# Altium PCB Main_Board.PcbDoc (part 10 of 14)
Units mm, origin at the board's own origin, x right, y up, seen from the top; angles counter-clockwise.
Board outline 142 x 82 mm, 10 copper layers (L1_Top, L2_PWR1, L3_Sig1, L4_GND1, L5_Sig2, L6_Sig3, L7_GND2, L8_Sig4, L9_GND3, L8_Bottom), stack 1.71 mm thick; 299 components, 328 nets, 2329 pads, 2908 vias.
Unrouted connection lines stored in the file: 2.
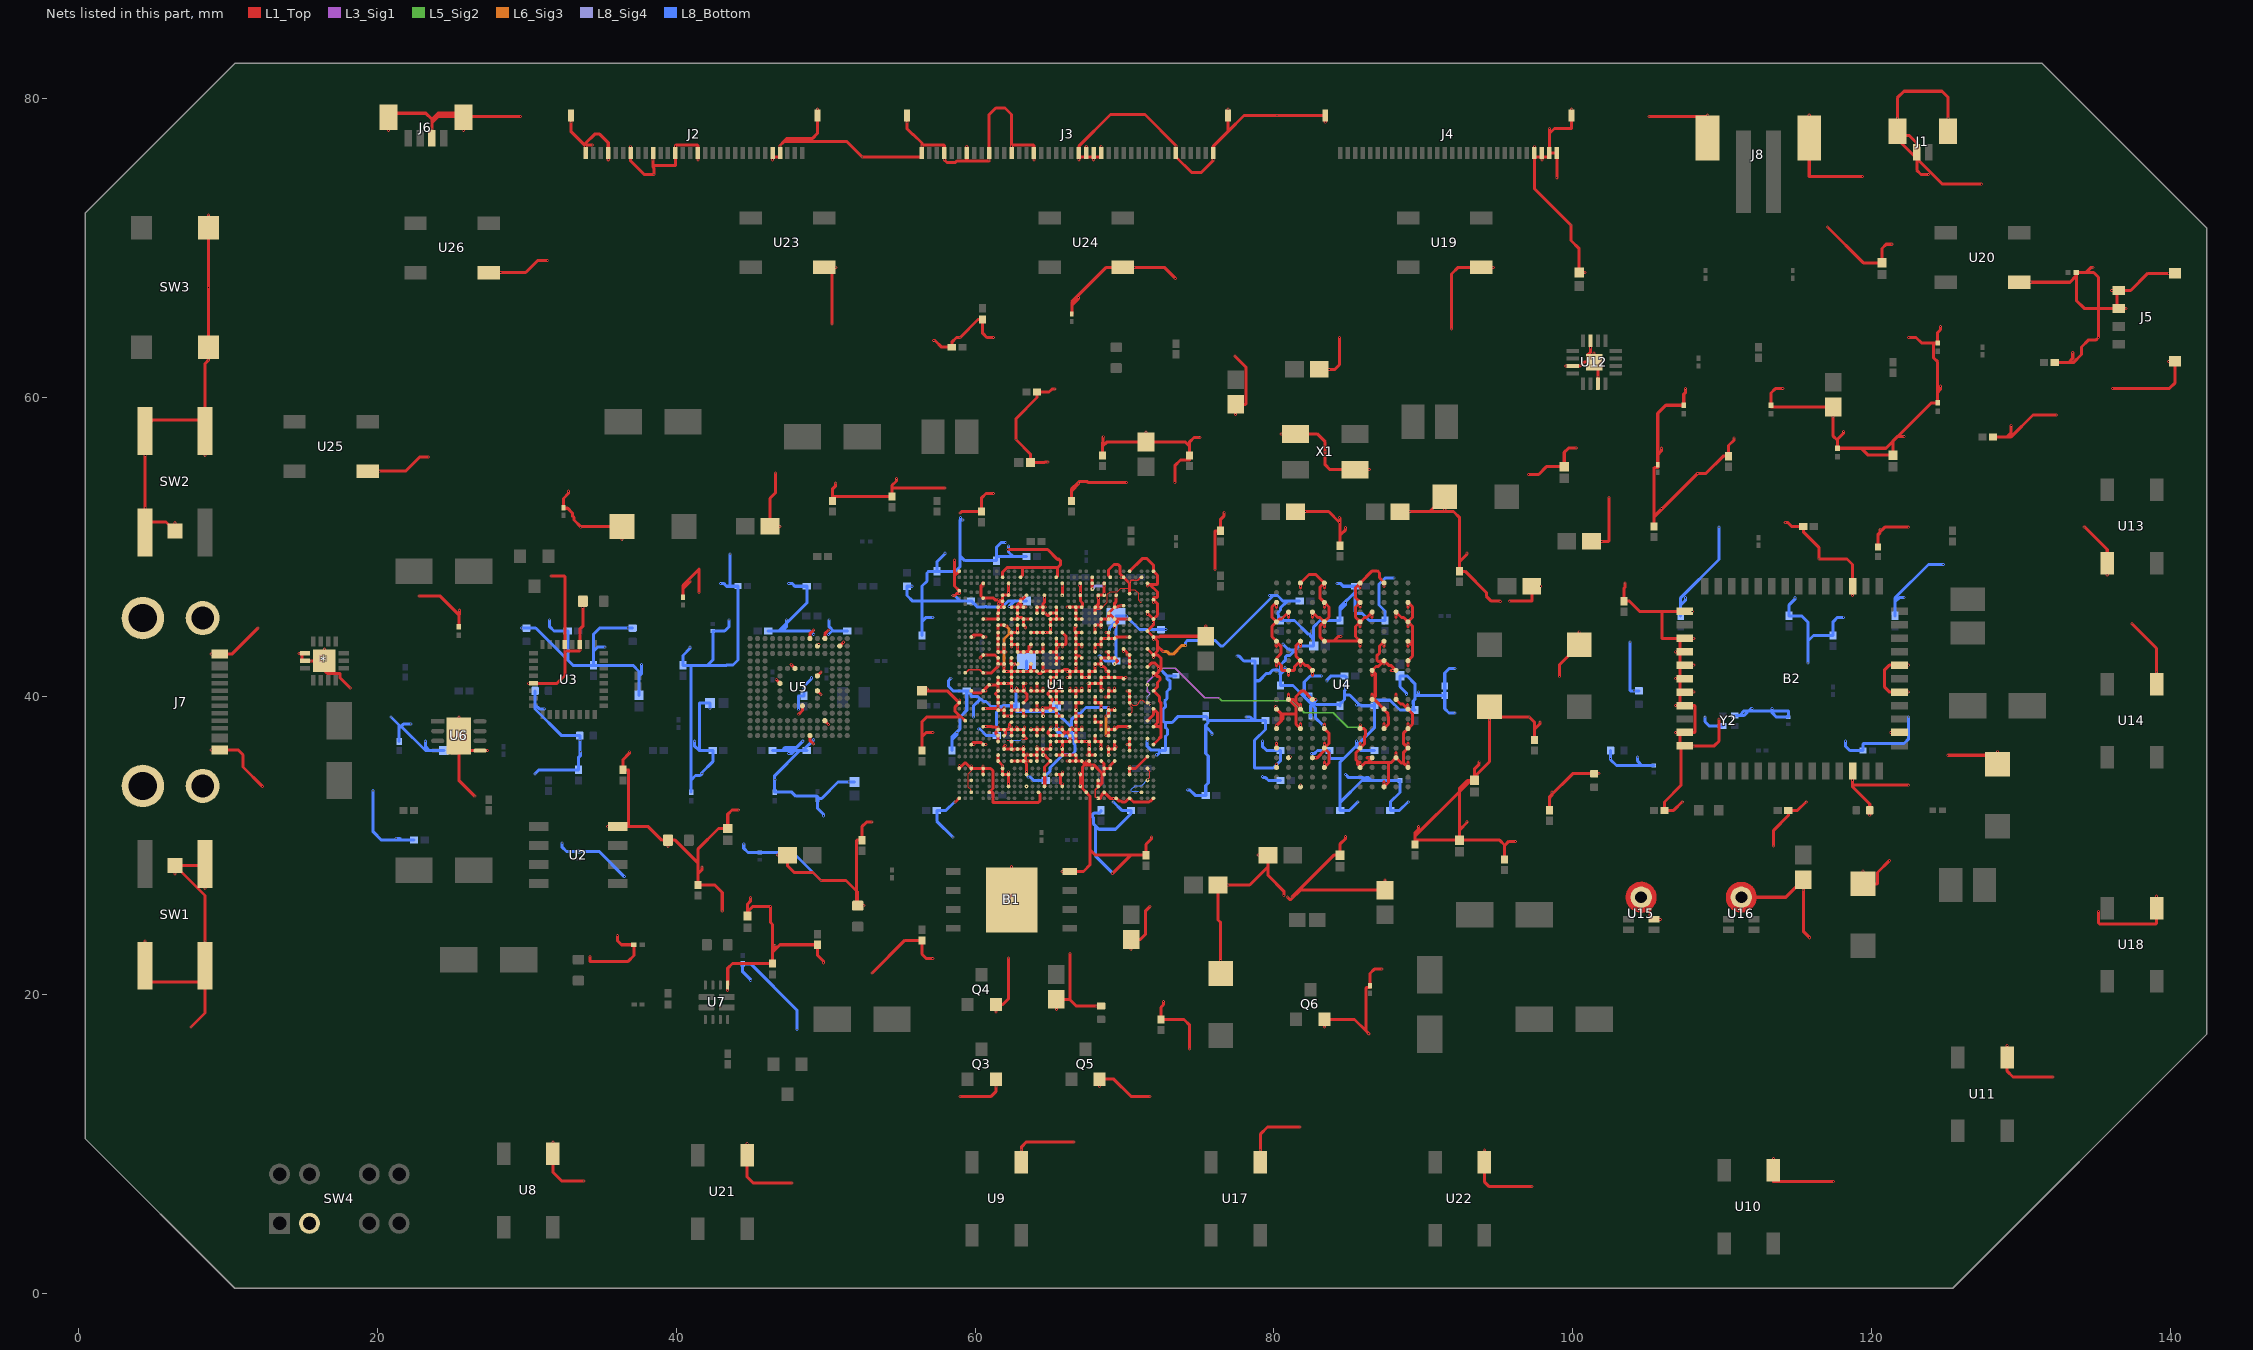
[diagram p17: the nets of this part, all layers, seen from the top]

## Via types
v1: diameter 0.1, hole 0.08, L1_Top to L8_Bottom, 1169 vias
v2: diameter 0.01, hole 0.01, L3_Sig1 to L8_Sig4, 433 vias
v3: diameter 0.01, hole 0.01, L8_Sig4 to L8_Bottom, 375 vias
v4: diameter 0.01, hole 0.01, L1_Top to L3_Sig1, 355 vias
v5: diameter 0.254, hole 0.01, L1_Top to L8_Bottom, 150 vias
v6: diameter 0.01, hole 0.01, L6_Sig3 to L8_Bottom, 129 vias
v7: diameter 0.05, hole 0.04, L1_Top to L8_Bottom, 104 vias
v8: diameter 0.01, hole 0.01, L1_Top to L5_Sig2, 89 vias
v9: diameter 0.01, hole 0.01, L1_Top to L8_Bottom, 41 vias
v10: diameter 0.1, hole 0.08, L1_Top to L3_Sig1, 17 vias
v11: diameter 0.1, hole 0.08, L1_Top to L5_Sig2, 11 vias
v12: diameter 0.1, hole 0.08, L8_Sig4 to L8_Bottom, 10 vias
v13: diameter 0.1, hole 0.08, L6_Sig3 to L8_Bottom, 9 vias
v14: diameter 1.27, hole 0.711, L1_Top to L8_Bottom, 8 vias
v15: diameter 0.4, hole 0.2, L1_Top to L8_Bottom, 4 vias
v16: diameter 0.05, hole 0.08, L1_Top to L8_Bottom, 3 vias
v17: diameter 0.05, hole 0.08, L6_Sig3 to L8_Bottom, 1 vias

## Nets (pads, with @x,y where several pads share a name; then routed paths per layer and width w, separated by ;. In a path a pad name is that pad's centre, name@x,y a point inside that pad or via, vN(x,y) a via of type N, cw(c..) or ccw(c..) an arc to the next point about the centre after c; other vN are vias at no path point) (continued)
GND: (continued)
  L1_Top w0.203: v1(4.441,23.599) SW1.B'@4.441,21.949 4.441,20.845 SW1.A'@8.441,20.845 ; v1@4.441,52.595 v1(4.441,52.599) ; v1(6.441,28.099) SW1.1@6.441,28.649 ; v1(6.441,51.599) SW2.1@6.441,51.049 5.835,51.656 4.441,51.656 SW2.A@4.441,50.949 v1(4.441,52.599) ; v7(7.514,17.848) 8.441,18.775 SW1.A'@8.441,20.845 ; v1(8.441,27.099) SW1.A@8.441,28.749 8.441,28.649 SW1.1@6.441,28.649 ; v1(8.441,56.099) SW2.B'@8.441,57.749 SW2.B'@8.441,58.463 ; v1(8.691,62.499) SW3.3@8.691,63.349 ; v1(8.691,72.199) SW3.4@8.691,71.349 8.691,67.362 v7(8.683,67.353) 8.691,67.344 SW3.3@8.691,63.349 ; v1(8.841,36.399) J7.B1@9.441,36.399 10.655,36.399 10.994,36.06 10.994,35.247 v7(12.289,33.952) ; v1(8.841,42.799) J7.A1@9.441,42.799 10.24,42.799 v7(11.985,44.544) ; v1(14.741,42.849) *.8@14.931,42.849 ; *.8@15.141,42.849 *.8@14.931,42.849 ; v1(16.441,43.149) *.15@16.441,42.349 *.15@15.805,42.349 ; v7(18.171,40.542) 17.471,41.242 17.471,41.496 17.446,41.521 16.633,41.521 *.15@15.805,42.349 ; U25.3@19.341,55.049 v1(20.141,55.049) 21.865,55.049 22.815,55.999 v7(23.415,55.999) ; v1(20.741,77.849) J6.S1@20.741,78.749 20.741,79.011 23.235,79.011 23.641,78.605 ; v7(22.78,46.703) 24.171,46.703 25.441,45.433 25.441,45.415 ; J6.3@23.641,77.349 v1(23.641,77.949) 23.641,78.375 ; C140.2@25.441,44.629 25.441,45.415 ; v1(25.443,38.599) U6.9@25.443,37.324 U6.9@25.443,36.349 ; v1(25.472,45.742) 25.472,45.446 25.441,45.415 ; v1(25.741,77.849) J6.S2@25.741,78.749 J6.S2@25.741,78.808 ; v7(26.513,33.291) 25.443,34.362 U6.9@25.443,36.349 ; v1(27.349,36.349) U6.5@26.858,36.349 U6.9@25.443,36.349 ; U26.3@27.441,68.349 v1(28.241,68.349) 29.917,68.349 30.724,69.156 v7(31.39,69.156) ; v7(29.561,78.808) J6.S2@25.741,78.808 ; v1(30.109,40.849) U3.5@30.441,40.849 32.012,40.849 32.541,41.378 32.541,43.045 ; v7(31.619,48.023) 32.508,48.023 32.541,47.99 U3.29@32.541,43.449 v1(32.541,43.099) 32.541,43.045 ; v1(31.741,10.149) U8.3@31.741,9.349 31.741,8.12 32.326,7.536 v7(33.803,7.536) ; v1(32.787,53.713) 32.787,53.575 32.441,53.229 R32.2@32.441,52.604 32.441,52.57 32.724,52.57 33.041,52.252 33.041,52.062 33.143,51.96 33.143,51.783 33.6,51.325 v7(33.6,51.3) 33.649,51.349 D17.1@36.366,51.349 v1(36.366,50.474) ; J2.31@32.941,78.849 v1(32.941,78.399) 32.941,77.802 v1@33.941,76.802 ; C145.2@33.741,46.349 v1(33.741,45.919) 33.741,44.671 33.541,44.471 U3.27@33.541,43.449 v1(33.541,43.099) 33.541,43.045 33.516,43.02 32.567,43.02 32.541,43.045 ; J2.1@33.941,76.349 v1(33.941,76.799) v1@33.941,76.802 ; v7(34.21,22.56) 34.21,22.268 34.235,22.242 36.775,22.242 37.161,22.629 C139.2@37.161,23.349 36.335,23.349 36.049,23.636 v1(36.049,23.97) ; v7(34.387,76.878) 33.967,76.878 33.941,76.852 ; v1(35.391,31.254) U2.4@36.091,31.254 36.775,31.254 ; v1(35.441,75.899) J2.4@35.441,76.349 35.441,77.043 34.87,77.614 34.538,77.614 33.941,77.017 33.941,76.852 ; v1(36.851,36.268) 36.851,36.161 36.441,35.751 R49.2@36.441,35.058 36.775,35.058 36.8,35.032 36.8,31.28 36.775,31.254 ; v1(36.941,76.799) J2.7@36.941,76.349 36.941,75.811 37.83,74.922 v7(38.502,74.922) 38.502,75.344 38.441,75.405 38.441,75.532 ; J2.10@38.441,76.349 v1(38.441,75.899) 38.441,75.532 ; v1(39.441,29.919) C146.2@39.441,30.349 ; R34.2@40.441,46.603 40.441,47.165 ; v1(40.915,47.713) 40.915,47.638 40.441,47.165 ; v1(41.441,75.899) J2.16@41.441,76.349 41.441,76.852 41.416,76.878 39.967,76.878 39.941,76.852 v1(39.941,76.799) J2.13@39.941,76.349 39.941,75.532 39.916,75.506 38.467,75.506 38.441,75.532 ; v7(41.525,46.938) 41.525,48.497 40.441,47.414 40.441,47.165 ; v1(41.728,28.559) 41.728,28.391 41.441,28.104 ; v7(43.074,25.595) 43.074,26.852 42.577,27.349 C30.2@41.441,27.349 41.441,28.104 ; U7.9@43.441,20.649 43.441,21.781 43.76,22.099 R71.1@46.441,22.099 ; v1(44.166,32.374) 43.728,32.374 43.441,32.087 C57.2@43.441,31.127 42.829,31.127 41.441,29.74 41.441,28.832 ; v1(44.741,10.049) U21.3@44.741,9.249 44.741,7.802 45.135,7.409 v7(47.748,7.409) ; v1(44.979,26.497) 44.979,26.287 44.776,26.083 C147.2@44.776,25.274 44.776,25.582 45.093,25.9 v7(46.3,25.9) 46.3,24.848 46.441,24.706 46.441,22.914 ; v1(46.441,75.899) J2.26@46.441,76.09 ; J2.26@46.441,76.349 J2.26@46.441,76.09 ; v1(46.605,23.307) 46.605,23.077 46.441,22.914 ; v7(46.63,54.932) 46.63,53.594 46.267,53.23 C89.2@46.267,51.349 v1(46.944,51.349) ; v1(46.691,41.099) U5.H10@46.941,40.849 ; v1(46.764,29.349) C90.2@47.441,29.349 47.441,28.632 47.887,28.186 49.145,28.186 v7(49.678,27.653) 51.355,27.653 52.066,26.941 ; v1(47.691,42.099) U5.K8@47.941,41.849 ; v1(48.191,38.782) 48.441,39.032 U5.E7@48.441,39.349 ; U5.A6@48.941,37.349 48.941,37.032 v1(49.191,36.782) ; U5.P6@48.941,43.849 48.941,44.167 v1(49.191,44.417) ; U5.G5@49.441,40.349 v1(49.691,40.099) ; U5.J5@49.441,41.349 v1(49.691,41.599) ; U5.N5@49.441,43.349 v1(49.535,43.442) ; v1(49.441,79.299) J2.32@49.441,78.849 49.441,77.652 49.124,77.335 47.424,77.335 47.195,77.106 ; v1(49.856,22.139) 49.856,22.244 49.441,22.658 R50.1@49.441,23.349 46.935,23.349 46.441,22.856 ; U5.C4@49.941,38.349 v1(50.191,38.099) ; U5.P4@49.941,43.849 49.941,44.167 v1(50.191,44.417) ; v7(50.415,64.914) 50.415,68.699 U23.3@49.891,68.699 v1(50.691,68.699) ; v1(50.669,54.268) 50.669,54.07 50.441,53.842 C58.2@50.441,53.058 50.441,53.349 C60.2@54.441,53.349 ; U5.N2@50.941,43.349 v1(51.191,43.599) ; v1(52.572,25.965) C148.2@52.142,25.965 ; v7(53.107,21.455) 55.293,23.641 C50.2@56.441,23.641 56.441,22.717 56.728,22.431 v1(57.171,22.431) ; v1(53.107,31.559) 52.728,31.559 52.441,31.272 C48.2@52.441,30.349 52.091,30.349 52.066,30.324 52.066,26.941 ; v1(54.733,54.559) 54.733,54.393 54.441,54.102 C60.2@54.441,53.349 ; J3.41@55.441,78.849 v1(55.441,78.399) 55.441,77.97 55.822,77.589 55.87,77.589 56.441,77.017 56.441,76.852 ; C52.2@56.441,36.349 56.441,37.272 ; C43.2@56.441,40.349 56.82,40.349 ; v1(56.82,40.463) 56.82,40.349 ; v1(57.171,37.559) 56.728,37.559 56.441,37.272 ; v1(57.231,63.797) 57.32,63.797 57.767,63.349 C133.2@58.441,63.349 58.441,63.682 58.759,64 v7(59,64) 60.202,65.202 R25.1@60.503,65.202 60.503,64.28 60.79,63.994 v1(61.235,63.994) ; v7(57.984,53.934) 54.479,53.934 54.441,53.897 C60.2@54.441,53.349 ; v1(58.523,46.728) 58.659,46.728 58.805,46.874 v1(58.941,46.874) U1.D33@58.941,47.049 58.621,47.369 58.621,48.029 ; v7(58.632,49.09) 58.621,49.09 58.621,48.029 ; v1(58.651,32.91) 58.69,32.91 58.929,33.149 U1.AU33@58.941,33.149 ; v1(58.941,35.345) U1.AM33@58.941,35.149 59.293,35.501 59.389,35.501 U1.AM31@59.741,35.149 ; v1(58.941,39.724) U1.AB33@58.941,39.549 ; U1.A33@58.941,48.349 58.621,48.029 ; v7(59,13.2) 61.074,13.2 61.391,13.517 v1(61.391,13.849) Q3.2@61.391,14.349 ; v7(59,52.252) 59.097,52.349 C62.2@60.441,52.349 60.441,53.272 60.728,53.559 v1(61.235,53.559) ; U1.AE32@59.341,38.349 59.091,38.6 59.039,38.6 ; v1(59.441,76.799) J3.7@59.441,76.349 59.441,75.836 ; v1(59.742,35.325) U1.AM31@59.742,35.15 ; U1.Y31@59.741,40.349 59.89,40.2 60.392,40.2 U1.Y29@60.541,40.349 ; v1(59.916,36.749) U1.AJ31@59.741,36.749 59.89,36.898 60.392,36.898 U1.AJ29@60.541,36.749 v1(60.716,36.749) ; v1(59.916,43.949) U1.L31@59.741,43.949 59.879,44.086 60.404,44.086 U1.L29@60.541,43.949 v1(60.716,43.949) ; v7(60.346,42.537) 60.346,42.554 U1.P29@60.541,42.749 v1(60.716,42.749) 61.329,42.749 61.529,42.549 U1.R26@61.541,42.549 U1.T26@61.541,42.149 ; U1.AN29@60.541,34.749 U1.AM29@60.541,35.149 ; v1(60.541,35.324) U1.AM29@60.541,35.149 ; U1.AF29@60.541,37.949 v1(60.716,37.949) 61.134,37.949 61.169,37.914 61.376,37.914 U1.AF26@61.541,37.749 ; U1.AC29@60.541,39.149 v1(60.716,39.149) 61.441,39.149 U1.AC26@61.541,39.049 ; U1.U29@60.541,41.549 v1(60.716,41.549) 61.093,41.549 61.439,41.896 61.463,41.896 61.541,41.974 v1(61.541,42.001) U1.T26@61.541,42.149 ; U1.H29@60.541,45.149 v1(60.716,45.149) U1.J26@61.541,45.149 U1.H26@61.541,45.549 61.565,45.573 61.565,45.925 U1.G26@61.541,45.949 61.676,45.949 61.692,45.966 U1.G25@61.925,45.966 ; v1(60.543,47.374) 60.543,47.547 U1.C29@60.541,47.549 60.397,47.405 60.397,46.694 U1.E29@60.541,46.549 61.232,46.549 61.343,46.439 v1(61.581,46.439) ; v1(60.716,40.349) U1.Y29@60.541,40.349 ; v1(61.391,18.849) Q4.2@61.391,19.349 61.857,19.349 62.226,19.717 v7(62.226,22.471) ; U1.AK26@61.541,36.049 61.54,36.048 61.54,35.651 U1.AL26@61.541,35.649 61.841,35.349 v1(61.841,35.324) U1.AM26@61.841,35.149 U1.AN26@61.841,34.749 U1.AN25@62.241,34.749 ; U1.AH26@61.541,36.949 61.54,36.951 61.54,37.348 U1.AG26@61.541,37.349 61.388,37.503 61.388,37.595 U1.AF26@61.541,37.749 ; v1(61.541,37.924) U1.AF26@61.541,37.749 ; U1.V26@61.541,41.249 U1.W26@61.541,40.849 ; U1.L26@61.541,44.249 61.54,44.248 61.54,43.851 U1.M26@61.541,43.849 U1.N26@61.541,43.449 v1(61.541,43.274) U1.P26@61.541,42.949 U1.P25@61.941,42.949 ; v1(61.541,44.408) U1.K26@61.541,44.749 U1.K25@61.941,44.749 61.941,44.737 61.992,44.686 62.055,44.686 v1(62.066,44.697) ; v1(61.581,46.174) 61.581,46.212 U1.F26@61.718,46.349 ; v1@61.581,46.398 61.692,46.398 61.718,46.372 U1.F26@61.718,46.349 ; U1.B26@61.841,47.949 61.85,47.958 61.85,48.307 62.151,48.608 63.14,48.608 ; U1.AG25@61.941,37.349 62.048,37.456 62.048,37.643 U1.AF25@61.941,37.749 ; v1(61.941,39.224) U1.AC25@61.941,39.049 ; U1.N25@61.941,43.449 v1(61.941,43.274) U1.P25@61.941,42.949 ; U1.G25@61.941,45.949 U1.G25@61.925,45.966 ; v1(62.019,36.702) 61.95,36.633 61.95,36.458 U1.AJ25@61.941,36.449 U1.AJ24@62.441,36.449 ; v1(62.073,42.949) U1.P25@61.941,42.949 ; v7(62.189,49.801) 64.857,49.801 65.503,49.155 65.602,49.155 65.733,49.025 65.733,48.81 65.53,48.608 ; U1.AR25@62.241,33.949 v1(62.241,34.124) U1.AN25@62.241,34.749 ; v1(62.241,34.924) U1.AN25@62.241,34.749 ; U1.C25@62.241,47.549 v1(62.241,47.374) v1(62.241,46.924) U1.E25@62.241,46.749 U1.E26@61.841,46.749 U1.F26@61.841,46.349 ; v1@62.28,37.911 U1.AF24@62.441,37.749 ; v1(62.294,37.924) 62.294,38.089 62.441,38.237 U1.AE24@62.441,38.249 ; v1(62.404,36.587) v1@62.441,36.587 ; B1.9@62.441,26.349 v1(62.441,28.574) ; U1.AL24@62.441,35.649 U1.AL23@62.841,35.649 U1.AL22@63.241,35.649 ; U1.AH24@62.441,36.949 62.441,36.624 v1@62.441,36.587 ; U1.AG24@62.441,37.349 U1.AF24@62.441,37.749 ; v1(62.441,37.924) U1.AF24@62.441,37.749 ; U1.AB24@62.441,39.549 62.429,39.537 62.429,39.062 U1.AC24@62.441,39.049 ; U1.R24@62.441,42.549 62.441,42.537 62.393,42.488 62.393,42.21 62.441,42.162 U1.T24@62.441,42.149 ; v1(62.441,43.274) U1.N24@62.441,43.449 ; U1.J24@62.441,45.149 U1.J23@62.841,45.149 62.841,45.16 62.94,45.259 63.045,45.259 63.062,45.243 63.135,45.243 63.229,45.149 U1.J22@63.241,45.149 ; U1.G24@62.441,45.949 U1.G23@62.841,45.949 ; J3.13@62.441,76.349 v1(62.441,76.799) 62.441,76.852 ; U1.T24@62.566,42.149 U1.T23@62.841,42.149 ; v1(62.579,42.069) 62.534,42.069 62.51,42.093 62.454,42.149 U1.T24@62.441,42.149 ; v1(62.604,36.387) 62.516,36.387 62.454,36.449 U1.AJ24@62.441,36.449 ; 62.604,36.449 U1.AJ23@62.841,36.449 U1.AJ22@63.241,36.449 ; v1(62.781,37.924) 62.832,37.873 62.832,37.758 U1.AF23@62.841,37.749 ; v1(62.781,40.524) 62.832,40.473 62.832,40.358 U1.Y23@62.841,40.349 ; v1(62.838,44.37) U1.L23@62.841,44.37 ; U1.K23@62.841,44.749 62.841,44.574 U1.L23@62.841,44.37 ; U1.J23@62.841,45.259 U1.H23@62.841,45.549 U1.G23@62.841,45.949 ; 62.958,46.218 62.85,46.11 62.85,45.958 U1.G23@62.841,45.949 ; U1.B23@63.041,47.949 63.166,48.073 63.166,48.582 63.14,48.608 ; U9.3@63.091,8.799 v1(63.091,9.599) 63.091,9.798 63.445,10.152 v7(66.62,10.152) ; v1(63.156,46.174) 63.041,46.174 63.041,46.218 63.041,46.266 U1.F23@63.041,46.349 63.041,46.487 63.179,46.487 U1.E22@63.441,46.749 ; v1(63.241,36.624) U1.AJ22@63.241,36.449 ; U1.AB22@63.241,39.549 63.488,39.796 63.488,40.103 U1.Y22@63.241,40.349 ; 63.241,40.53 U1.W22@63.241,40.849 v1(63.416,40.849) ; v1(63.302,37.924) 63.302,37.822 63.241,37.762 U1.AF22@63.241,37.749 ; v1(63.307,40.53) 63.307,40.428 63.241,40.362 U1.Y22@63.241,40.349 ; v1(63.359,44.547) 63.359,44.619 63.241,44.737 U1.J22@63.241,45.149 ; v1(63.416,38.649) U1.AD22@63.241,38.649 U1.AC22@63.241,39.049 63.115,39.049 63.107,39.057 62.841,39.057 U1.AC23@62.841,39.049 U1.AC24@62.441,39.049 ; v1(63.416,45.949) U1.G22@63.241,45.949 U1.G23@62.841,45.949 ; v1(63.439,34.955) v1@63.441,34.955 ; U1.AN22@63.441,34.749 63.441,34.924 v1@63.441,34.955 ; 63.445,37.158 63.254,37.349 U1.AG22@63.241,37.349 U1.AF22@63.241,37.749 ; 63.477,36.049 U1.AK21@63.741,36.049 U1.AK20@64.141,36.049 ; v1(63.477,36.11) 63.477,36.077 63.458,36.058 63.25,36.058 U1.AK22@63.241,36.049 ; U1.AL21@63.741,35.649 v1(63.502,35.649) 63.416,35.649 U1.AL22@63.241,35.649 ; v1(63.741,37.824) U1.AF21@63.741,37.749 U1.AF20@64.141,37.749 ; U1.AC21@63.741,39.049 U1.AC20@64.141,39.049 ; v1(63.741,40.524) U1.Y21@63.741,40.349 U1.Y20@64.141,40.349 ; U1.T21@63.741,42.149 63.724,42.132 63.724,41.666 U1.U21@63.741,41.649 ; v1(63.741,43.274) U1.N21@63.741,43.449 63.597,43.305 63.597,43.093 U1.P21@63.722,42.969 ; U1.L21@63.741,44.249 63.756,44.264 64.126,44.264 U1.L20@64.141,44.249 U1.L19@64.541,44.249 v1(64.716,44.249) U1.L18@65.041,44.249 v1(65.041,44.574) U1.K18@65.041,44.749 U1.J18@65.041,45.149 U1.J17@65.441,45.149 ; U1.J21@63.741,45.149 v1(63.416,45.149) U1.J22@63.241,45.149 ; v1(63.941,75.899) J3.16@63.941,76.349 63.941,76.852 63.916,76.878 62.467,76.878 62.441,76.852 ; U1.AL20@64.141,35.649 U1.AK20@64.141,36.049 ; v1(64.141,36.624) U1.AJ20@64.141,36.449 ; U1.AG20@64.141,37.349 U1.AF20@64.141,37.749 ; v1(64.141,37.924) U1.AF20@64.141,37.749 ; U1.AB20@64.141,39.549 v1(64.141,39.224) U1.AC20@64.141,39.049 ; U1.W20@64.141,40.849 v1(64.141,40.524) U1.Y20@64.141,40.349 ; U1.H20@64.141,45.549 U1.G20@64.141,45.949 U1.G19@64.541,45.949 ; U1.AT20@64.241,33.549 64.359,33.431 64.359,32.996 64.248,32.885 61.217,32.885 61.191,32.91 61.191,33.52 61.162,33.549 U1.AT28@60.941,33.549 61.195,33.803 61.195,34.993 61.039,35.149 U1.AM29@60.541,35.149 ; v1(64.518,39.224) 64.532,39.209 64.532,39.058 U1.AC19@64.541,39.049 ; v1(64.54,41.726) U1.U19@64.541,41.726 ; v1(64.541,37.924) U1.AF19@64.541,37.749 U1.AF20@64.141,37.749 ; v1(64.541,40.524) U1.Y19@64.541,40.349 U1.Y20@64.141,40.349 ; U1.T19@64.541,42.149 U1.U19@64.541,41.726 ; U1.N19@64.541,43.449 v1(64.541,43.274) U1.P19@64.541,42.949 U1.P20@64.141,42.949 U1.P21@63.741,42.949 U1.P21@63.722,42.969 ; v1(64.574,36.448) v1(64.574,36.448) ; v1(64.574,38.649) U1.AD19@64.541,38.649 U1.AC19@64.541,39.049 ; v1(64.58,39.194) 65.031,39.194 65.041,39.183 ; v1(64.633,34.911) 64.633,34.758 U1.AN19@64.641,34.749 64.641,34.584 64.664,34.561 64.664,33.972 U1.AR19@64.641,33.949 ; v1@64.641,34.913 64.641,34.924 64.641,35.249 U1.AL18@65.041,35.649 64.715,35.976 64.715,36.024 64.69,36.049 v1(64.574,36.049) U1.AK19@64.541,36.049 U1.AJ19@64.541,36.449 ; U1.E19@64.641,46.749 v1(64.641,46.574) 64.641,46.271 64.541,46.171 U1.G19@64.541,45.949 ; 64.716,41.649 64.554,41.649 U1.U19@64.541,41.649 ; 64.716,41.679 64.999,41.679 65.029,41.649 U1.U18@65.041,41.649 U1.U17@65.441,41.649 ; v1(64.716,45.949) U1.G19@64.541,45.949 ; v1(64.867,55.669) 64.668,55.669 64.617,55.618 C91.2@63.707,55.618 63.707,56.194 v7(62.734,57.167) 62.734,58.571 64.15,59.987 C53.2@64.15,60.349 64.95,60.349 65.146,60.546 v1(65.356,60.546) ; v1(64.948,40.535) 64.948,40.743 65.041,40.837 U1.W18@65.041,40.849 U1.V18@65.041,41.249 U1.V17@65.441,41.249 U1.U17@65.441,41.649 ; 65.041,36.624 U1.AH18@65.041,36.949 ; 65.041,40.525 U1.Y18@65.041,40.349 ; U1.P18@65.041,42.949 U1.P17@65.441,42.949 ; v1(65.095,36.624) 65.095,36.515 65.041,36.462 U1.AJ18@65.041,36.449 64.716,36.449 v1(64.574,36.448) ; v1(65.095,37.924) 65.05,37.88 65.05,37.758 64.893,37.601 64.893,37.498 U1.AG18@65.041,37.349 U1.AG17@65.441,37.349 U1.AG16@65.841,37.349 66.01,37.518 66.01,37.58 U1.AF16@65.841,37.749 ; v1(65.441,19.021) C114.2@65.441,19.698 66.315,19.698 ; U1.AN17@65.441,34.749 U1.AN16@65.841,34.749 ; U1.AK17@65.441,36.049 65.448,36.043 65.835,36.043 U1.AK16@65.841,36.049 ; U1.AH17@65.441,36.949 U1.AH16@65.841,36.949 ; U1.AE17@65.441,38.249 v1(65.441,37.924) U1.AF17@65.441,37.749 U1.AF16@65.841,37.749 ; U1.T17@65.441,42.149 U1.R17@65.441,42.549 ; U1.M17@65.441,43.849 U1.N17@65.441,43.449 ; U1.G17@65.441,45.949 U1.H17@65.441,45.549 ; U1.B17@65.441,47.949 65.53,48.038 65.53,48.608 ; v1(65.561,43.274) 65.441,43.274 ; v1(65.59,40.524) 65.587,40.524 65.487,40.424 65.487,40.407 65.441,40.362 U1.Y17@65.441,40.349 ; v1(65.792,36.575) v1@65.841,36.575 ; 65.797,34.096 65.706,34.188 65.706,34.613 U1.AN16@65.841,34.749 ; v1(65.816,28.254) B1.4@66.341,28.254 67.255,28.254 67.697,28.697 67.697,29.71 ; v1(65.82,37.924) 65.832,37.912 65.832,37.758 U1.AF16@65.841,37.749 ; U1.AR16@65.841,33.949 v1(65.841,34.124) ; v1(65.841,34.924) U1.AN16@65.841,34.749 ; U1.AD16@65.841,38.649 U1.AD17@65.441,38.649 U1.AC17@65.441,39.049 65.429,39.049 65.302,39.176 65.181,39.176 65.054,39.049 U1.AC18@65.041,39.049 65.041,39.183 ; U1.AB16@65.841,39.549 U1.AB17@65.441,39.549 U1.AA17@65.441,39.949 U1.Y17@65.441,40.349 ; v1(65.841,40.524) U1.Y16@65.841,40.349 U1.Y17@65.441,40.349 ; U1.R16@65.841,42.549 U1.R17@65.441,42.549 ; v1(65.841,43.274) U1.N16@65.841,43.449 ; U1.L16@65.841,44.249 66.088,44.003 66.088,43.476 66.061,43.449 U1.N16@65.841,43.449 ; U1.J16@65.841,45.149 U1.J17@65.441,45.149 ; v1(65.841,46.715) U1.E16@65.841,46.749 v1(65.841,47.374) U1.C16@65.841,47.549 ; v1(66.166,35.649) U1.AL15@66.341,35.649 U1.AL14@66.741,35.649 ; v1(66.166,41.249) U1.V15@66.341,41.249 U1.U15@66.341,41.649 ; v1(66.166,41.649) U1.U15@66.341,41.649 ; v1(66.166,45.946) 66.338,45.946 U1.G15@66.341,45.949 U1.G14@66.741,45.949 ; v7(66.341,22.75) 66.341,19.724 66.315,19.698 ; v1(66.341,40.524) U1.Y15@66.341,40.349 U1.Y14@66.741,40.349 ; C47.2@66.441,53.058 66.441,53.714 ; R24.2@66.472,65.577 66.472,66.149 ; v1(66.486,37.899) 66.341,37.755 U1.AF15@66.341,37.749 ; v1(66.698,44.647) 66.698,44.306 66.741,44.262 U1.L14@66.741,44.249 ; U1.AA14@66.741,39.949 U1.Y14@66.741,40.349 ; v1(66.741,40.524) U1.Y14@66.741,40.349 ; U1.R14@66.741,42.602 U1.P14@66.741,42.949 v1(66.741,43.274) U1.N14@66.741,43.449 ; U1.K14@66.741,44.636 U1.K14@66.741,44.749 ; v1(66.788,39.1) U1.AC14@66.741,39.1 ; v1(66.925,54.268) 66.925,54.198 66.504,53.777 66.441,53.714 ; v1(66.925,66.687) 66.925,66.601 66.472,66.149 ; v1(66.941,75.899) J3.22@66.941,76.09 ; v1(66.994,34.842) 66.994,34.796 U1.AN13@67.041,34.749 67.041,34.124 v1(67.041,34.032) U1.AR13@67.041,33.949 ; v1(67.004,47.411) v1@67.041,47.411 ; U1.C13@67.041,47.549 v1@67.041,47.411 ; v1(67.141,37.924) U1.AF13@67.141,37.749 U1.AF14@66.741,37.749 ; U1.AD13@67.141,38.649 U1.AD14@66.741,38.649 ; U1.AB13@67.141,39.549 U1.AB14@66.741,39.549 U1.AC14@66.741,39.1 ; v1(67.141,40.524) U1.Y13@67.141,40.349 U1.Y14@66.741,40.349 ; U1.R13@67.141,42.549 67.141,42.551 67.017,42.676 66.881,42.676 66.774,42.569 66.754,42.549 U1.R14@66.741,42.549 U1.T14@66.741,42.149 v1(66.741,41.974) U1.U14@66.741,41.649 ; v1(67.141,43.274) U1.N13@67.141,43.449 U1.N14@66.741,43.449 ; U1.L13@67.141,44.249 U1.L14@66.741,44.249 ; U1.J13@67.141,45.149 U1.J14@66.741,45.149 U1.H14@66.741,45.549 66.747,45.555 66.747,45.944 U1.G14@66.741,45.949 ; U1.G13@67.141,45.949 U1.G13@67.125,45.966 ; v1(67.441,76.799) J3.23@67.441,76.349 J3.23@67.441,76.09 ; v1(67.466,35.649) U1.AL12@67.641,35.649 ; v1(67.49,36.049) U1.AK12@67.641,36.049 ; v1(67.566,40.849) U1.W12@67.641,40.849 ; U1.Y12@67.641,40.349 v1(67.641,40.524) U1.W12@67.641,40.849 ; U1.AM11@67.841,35.149 v1(67.841,35.324) ; U1.D11@67.841,47.149 U1.C11@67.841,47.549 U1.B11@67.841,47.949 ; v1(67.941,75.899) J3.24@67.941,76.09 ; J3.24@67.941,76.349 J3.24@67.941,76.09 ; U1.AK11@68.041,36.049 U1.AK12@67.641,36.049 ; U1.AG11@68.041,37.349 U1.AH11@68.041,36.949 U1.AH10@68.441,36.949 v1@68.441,36.624 ; U1.AD11@68.041,38.649 U1.AE11@68.041,38.249 U1.AE10@68.441,38.249 v1(68.441,37.924) U1.AF10@68.441,37.749 ; U1.AA11@68.041,39.949 U1.AB11@68.041,39.549 68.407,39.549 U1.AB10@68.441,39.514 ; U1.P11@68.041,42.949 v1(68.041,43.103) 68.041,43.274 U1.N11@68.041,43.449 U1.N10@68.441,43.449 ; U1.L11@68.041,44.249 v1(68.041,44.574) U1.K11@68.041,44.749 U1.K10@68.441,44.749 ; U1.H11@68.041,45.549 68.041,45.815 U1.G11@68.041,45.949 U1.G11@68.058,45.966 ; U1.AU10@68.241,33.149 68.38,33.149 68.395,33.164 68.395,33.251 68.483,33.34 68.483,33.391 U1.AT9@68.641,33.549 69.041,33.149 v1(69.266,33.149) U1.AU7@69.441,33.149 69.454,33.149 69.641,32.962 69.78,32.962 69.839,32.903 70.044,32.903 70.281,33.14 70.332,33.14 U1.AU5@70.341,33.149 70.354,33.149 70.601,32.903 71.644,32.903 71.703,32.962 71.742,32.962 71.929,33.149 U1.AU1@71.941,33.149 ; U1.AR10@68.241,33.909 68.488,34.155 68.488,34.851 67.944,35.396 67.641,35.396 ; U1.AR10@68.241,33.949 U1.AP10@68.241,34.349 ; v1@68.241,46.55 68.241,46.574 U1.E10@68.241,46.749 U1.E9@68.641,46.749 v1(68.641,46.843) 68.641,46.924 v1(68.641,47.374) U1.C9@68.641,47.549 ; v1(68.266,46.55) 68.266,46.173 U1.G11@68.058,45.966 ; v1(68.341,13.849) Q5.2@68.341,14.349 69.287,14.349 70.436,13.2 v7(71.7,13.2) ; v1(68.393,36.624) v1@68.441,36.624 ; C137.2@68.441,19.249 v1(68.116,19.249) 66.772,19.249 66.323,19.698 66.315,19.698 ; U1.AL10@68.441,35.649 68.641,35.449 U1.AM9@68.641,35.149 ; U1.AJ10@68.441,36.449 v1@68.441,36.624 ; U1.AC10@68.441,39.049 v1(68.441,39.224) U1.AB10@68.441,39.514 ; U1.AB10@68.441,39.549 U1.AB10@68.441,39.514 ; U1.Y10@68.441,40.349 U1.Y10@68.441,40.421 ; v1(68.441,43.274) U1.N10@68.441,43.449 ; v1(68.441,44.574) U1.K10@68.441,44.749 ; U1.G10@68.441,45.949 68.425,45.966 U1.G11@68.058,45.966 ; v1(68.441,76.799) J3.25@68.441,76.349 68.441,76.09 J3.24@67.941,76.09 ; C92.2@68.525,56.099 68.525,56.697 ; v1(68.564,40.421) U1.Y10@68.441,40.421 ; v1(68.593,57.352) 68.55,57.309 68.55,57.01 68.525,56.985 68.525,56.697 ; U1.AN9@68.641,34.749 U1.AM9@68.641,35.149 ; v1(68.688,39.949) U1.AA9@68.941,39.949 U1.Y9@68.941,40.349 ; v1(68.766,37.349) U1.AG9@68.941,37.349 U1.AF9@68.941,37.749 ; v1(68.766,38.649) U1.AD9@68.941,38.649 U1.AC9@68.941,39.049 ; v1(68.766,42.949) U1.P9@68.941,42.949 U1.R9@68.941,42.549 ; v1(68.766,44.249) U1.L9@68.941,44.249 U1.M9@68.941,43.849 ; v1(68.907,36.624) 68.907,36.497 68.941,36.462 U1.AJ9@68.941,36.449 ; v1(68.941,37.924) U1.AF9@68.941,37.749 ; v1(68.941,39.224) U1.AC9@68.941,39.049 ; v1(68.963,40.524) 68.95,40.511 68.95,40.358 U1.Y9@68.941,40.349 ; v1(68.967,36.048) 68.943,36.048 U1.AK9@68.941,36.049 U1.AJ9@68.941,36.449 ; U1.H9@68.982,45.59 69.35,45.958 69.549,45.958 69.625,46.034 69.751,46.034 v1(69.766,46.049) U1.F6@69.941,46.049 ; U1.B8@69.041,47.949 68.931,48.059 68.931,48.443 69.297,48.809 69.574,48.809 69.693,48.69 69.693,48.197 U1.B6@69.941,47.949 ; v7(69.211,28.135) 70.425,29.349 ; U1.AL8@69.341,35.649 69.041,35.349 v1(69.041,35.324) U1.AM8@69.041,35.149 U1.AM9@68.641,35.149 ; 69.341,36.624 U1.AH8@69.341,36.949 ; v1(69.341,37.924) U1.AF8@69.341,37.749 ; v1(69.341,39.158) U1.AC8@69.341,39.049 U1.AC9@68.941,39.049 ; v1(69.341,40.524) U1.Y8@69.341,40.349 U1.Y9@68.941,40.349 ; v1(69.341,42.146) U1.T8@69.341,42.149 69.541,42.349 U1.R8@69.341,42.549 U1.R9@68.941,42.549 ; v1(69.341,44.574) U1.K8@69.341,44.749 69.516,44.923 69.516,44.975 U1.J8@69.341,45.149 ; U1.G8@69.343,45.951 69.343,46.218 69.441,46.316 v1(69.441,46.574) ; v1(69.428,36.624) 69.428,36.548 69.341,36.462 U1.AJ8@69.341,36.449 U1.AJ9@68.941,36.449 ; U1.E7@69.441,46.649 U1.E7@69.441,46.749 ; v1(69.766,47.949) U1.B6@69.941,47.949 ; v1(69.941,42.974) U1.N6@69.941,43.149 70.176,42.915 70.176,42.775 70.201,42.749 U1.P5@70.341,42.749 ; v1(70.087,41.239) 70.044,41.239 69.954,41.149 U1.V6@69.941,41.149 69.841,41.249 U1.V8@69.341,41.249 U1.V9@68.941,41.249 ; v7(70.125,54.297) 67.55,54.297 67.479,54.368 66.996,54.368 66.925,54.297 66.899,54.297 66.441,53.84 66.441,53.714 ; v1(70.166,36.749) U1.AJ5@70.341,36.749 ; v1(70.166,40.349) U1.Y5@70.341,40.349 U1.AA5@70.341,39.949 U1.AB5@70.341,39.549 ; v1(70.166,42.749) U1.P5@70.341,42.749 ; v1(70.238,37.877) 70.166,37.949 69.541,37.949 U1.AF8@69.341,37.749 ; U1.AF5@70.238,37.949 U1.AF5@70.341,37.949 ; U1.AN5@70.341,34.749 U1.AM5@70.341,35.149 ; U1.AK5@70.341,36.349 U1.AJ5@70.341,36.749 ; U1.AH5@70.341,37.149 U1.AJ5@70.341,36.749 ; U1.T5@70.341,41.949 U1.R5@70.341,42.349 U1.P5@70.341,42.749 ; U1.L5@70.341,43.949 v1(70.166,43.949) 69.441,43.949 U1.M8@69.341,43.849 U1.M9@68.941,43.849 ; U1.H5@70.341,45.149 v1(70.166,45.149) U1.J8@69.341,45.149 ; U1.D5@70.341,46.849 70.341,47.549 ; v1(70.341,47.627) 70.341,47.549 ; U1.A5@70.341,48.349 71.184,49.192 71.51,49.192 71.941,48.76 U1.A1@71.941,48.349 72.208,48.083 72.208,47.49 72.183,47.465 71.7,47.465 ; v1(70.373,35.292) 70.35,35.269 70.35,35.158 U1.AM5@70.341,35.149 ; v1(70.441,23.021) C105.2@70.441,23.698 71.065,23.698 71.395,24.028 71.395,25.595 v7(71.7,25.9) ; C56.2@71.441,57 C56.2@71.441,57.015 ; v1(71.441,57.678) C56.2@71.441,57.015 ; U1.AL2@71.541,35.949 70.741,35.149 U1.AM5@70.341,35.149 ; U1.AE2@71.541,38.349 71.941,38.749 U1.AC1@71.941,39.149 72.208,38.883 72.208,38.216 U1.AF1@71.941,37.949 72.313,37.949 72.348,37.914 ; U1.T2@71.541,41.949 71.554,41.949 71.801,42.196 72.044,42.196 72.282,41.958 v1(72.282,41.851) ; U1.N2@71.541,43.149 U1.P1@71.941,42.749 ; v1(71.541,45.474) v1@71.541,45.509 ; U1.G2@71.541,45.649 v1@71.541,45.509 ; v1(71.541,47.374) U1.C2@71.541,47.465 ; U1.C2@71.541,47.549 U1.C2@71.541,47.465 ; v1(71.802,30.559) 71.802,30.427 71.441,30.067 C51.2@71.441,29.349 70.425,29.349 ; U1.AJ1@71.941,36.749 72.348,37.156 72.348,37.238 72.431,37.238 72.431,39.55 72.346,39.635 72.346,39.945 U1.Y1@71.941,40.349 72.208,40.616 72.208,40.9 72.38,41.071 72.38,41.214 72.279,41.314 72.189,41.314 72.083,41.42 ; v1(71.941,41.374) U1.U1@71.941,41.549 71.954,41.549 72.083,41.42 ; v1(71.941,42.574) U1.P1@71.941,42.749 ; v1(71.941,43.774) U1.L1@71.941,43.949 ; v1(71.941,46.274) U1.E1@71.941,46.449 ; v9(72.591,42.971) 72.208,43.355 ; v1(72.614,19.559) 72.614,19.334 72.441,19.161 C49.2@72.441,18.349 73.98,18.349 74.367,17.962 v7(74.367,16.375) ; v7(73.368,54.306) 73.368,55.419 73.745,55.796 74.342,55.796 74.367,55.821 C93.2@74.367,56.099 74.367,56.697 ; v7(73.402,67.962) 72.665,68.699 v1(70.691,68.699) U24.3@69.891,68.699 68.784,68.699 66.472,66.388 66.472,66.149 ; v1(75.053,57.309) 74.654,57.309 74.367,57.022 74.367,56.697 ; v1(75.441,44.678) C98.2@75.441,44 72.386,44 72.335,43.949 U1.L1@71.941,43.949 ; v7(76.069,48.481) 76.069,51.032 76.094,51.058 C94.2@76.441,51.058 76.441,51.837 76.678,52.074 v1(76.678,52.268) ; D14.2@76.441,21.424 v1(76.441,22.299) 76.441,24.833 76.267,25.008 C97.2@76.267,27.349 v1(76.944,27.349) 78.38,27.349 79.616,28.585 ; v1(76.941,79.299) J3.42@76.941,78.849 76.941,77.802 ; v7(77.39,62.755) 78.126,62.019 78.126,59.549 78.101,59.524 C41.2@77.441,59.524 v1(77.441,58.846) ; v1(78.938,29.349) C106.2@79.616,29.349 79.616,28.585 ; U17.3@79.091,8.799 v1(79.091,9.599) 79.091,10.66 79.574,11.143 v7(81.758,11.143) ; v1(80.122,39.304) 80.154,39.272 80.154,39.144 80.488,38.81 80.488,38.346 ; v1(80.138,43.49) 80.138,43.361 80.18,43.318 ; U4.C12@80.18,35.218 v1(80.18,35.438) ; U4.E12@80.18,36.518 v1(80.18,36.828) v1@80.18,36.868 ; U4.G12@80.18,37.818 80.188,37.826 v1(80.188,38.046) 80.488,38.346 ; 80.18,42.018 v1(80.18,42.148) U4.P12@80.18,42.368 ; v1@80.18,43.49 U4.T12@80.18,43.668 ; 80.18,45.918 v1(80.18,46.048) U4.Y12@80.18,46.268 79.879,45.967 79.879,45.269 U4.V12@80.18,44.968 ; v1(80.491,57.549) X1.2@81.441,57.549 82.901,57.549 83.435,57.015 v7(83.435,56.355) 83.435,55.479 83.765,55.149 X1.4@85.441,55.149 v1(86.391,55.149) ; v7(80.666,26.637) 80.666,26.933 79.616,27.983 79.616,28.585 ; v7(80.907,26.535) 81.059,26.383 81.142,26.383 81.76,27 C113.2@87.441,27 v1(87.441,27.678) ; U4.D11@80.98,35.868 81.017,35.868 81.08,35.931 v1(81.125,35.931) ; 80.98,40.118 v1(80.98,39.988) U4.K11@80.98,39.768 ; 80.98,41.368 v1(80.98,41.498) U4.N11@80.98,41.718 ; 80.98,45.268 v1(80.98,45.398) U4.W11@80.98,45.618 80.515,45.153 80.365,45.153 U4.V12@80.18,44.968 ; v7(81.225,26.535) 81.225,26.555 84.019,29.349 C73.2@84.441,29.349 84.441,30.102 84.806,30.467 v1(84.806,30.596) ; C82.2@81.441,52.349 v1(82.119,52.349) 83.668,52.349 v7(84.4,51.617) ; U4.A10@81.78,33.918 v1(81.78,34.038) ; 81.78,38.168 v1(81.78,38.038) U4.G10@81.78,37.818 81.479,38.119 81.479,38.778 ; U4.J10@81.78,39.118 v1@81.78,39.289 ; 81.78,39.468 v1(81.78,39.338) v1@81.78,39.289 ; 81.78,42.018 v1(81.78,42.148) U4.P10@81.78,42.368 ; 81.78,43.318 v1(81.78,43.448) U4.T10@81.78,43.668 81.479,43.367 81.479,42.669 U4.P10@81.78,42.368 ; 81.78,47.218 v1(81.78,47.348) U4.AB10@81.78,47.568 82.351,48.139 82.809,48.139 U4.AB8@83.38,47.568 ; U4.D9@82.58,35.868 v1(82.8,35.868) 82.901,35.868 83.38,36.347 U4.E8@83.38,36.518 ; 82.58,41.368 v1(82.58,41.488) 82.58,41.498 U4.N9@82.58,41.718 82.269,42.029 82.119,42.029 U4.P10@81.78,42.368 ; 82.58,45.268 v1(82.58,45.398) U4.W9@82.58,45.618 82.943,45.255 83.093,45.255 U4.V8@83.38,44.968 ; v1(82.8,39.768) U4.K9@82.58,39.768 82.004,40.344 81.86,40.344 81.479,39.963 81.479,39.59 ; C25.2@83.037,61.862 v1(83.715,61.862) 84.082,61.862 84.4,62.179 v7(84.4,64) ; 83.38,35.568 v1(83.38,35.438) U4.C8@83.38,35.218 83.689,35.527 83.689,36.209 U4.E8@83.38,36.518 ; 83.38,36.868 v1(83.38,36.738) U4.E8@83.38,36.518 ; 83.38,44.618 v1(83.38,44.748) U4.V8@83.38,44.968 ; 83.38,45.918 v1(83.38,46.048) U4.Y8@83.38,46.268 ; 83.38,47.218 v1(83.38,47.348) U4.AB8@83.38,47.568 ; v1(83.391,17.849) Q6.2@83.391,18.349 85.398,18.349 86.178,17.569 ; 83.406,38.142 83.406,38.064 v1(83.38,38.038) U4.G8@83.38,37.818 83.689,37.509 83.689,36.827 U4.E8@83.38,36.518 ; v1(83.441,78.411) J4.31@83.441,78.849 83.441,78.859 v7(80.209,78.859) 77.999,78.859 76.941,77.802 ; v7(84.4,51.935) 84.441,51.894 84.441,50.773 ; C95.2@84.441,50.058 84.441,50.773 ; v1(84.483,43.994) 84.334,43.994 84.008,43.668 ; v1(84.806,51.268) 84.806,51.138 84.441,50.773 ; 85.754,45.944 85.78,45.97 85.78,46.048 v1(85.78,46.056) U4.Y5@85.78,46.268 ; 85.78,35.568 v1(85.78,35.438) U4.C5@85.78,35.229 ; v1@85.78,36.717 85.78,36.738 85.78,36.868 ; U4.G5@85.78,37.818 U4.G5@85.804,37.842 ; 85.78,43.318 v1(85.78,43.448) U4.T5@85.78,43.668 ; 85.78,44.618 v1(85.78,44.748) U4.V5@85.78,44.968 ; 85.78,47.218 v1(85.78,47.348) U4.AB5@85.78,47.568 ; v1(85.801,36.717) U4.E5@85.801,36.539 ; v1(85.814,38.072) 85.806,38.064 85.806,37.844 U4.G5@85.804,37.842 ; 86.23,35.868 v1(86.36,35.868) U4.D4@86.58,35.868 86.264,35.552 ; v7(86.356,17.391) 86.178,17.569 ; 86.58,40.118 v1(86.58,39.988) U4.K4@86.58,39.768 ; 86.58,41.368 v1(86.58,41.498) U4.N4@86.58,41.718 ; 86.58,45.268 v1(86.58,45.398) U4.W4@86.58,45.618 86.217,45.255 86.067,45.255 U4.V5@85.78,44.968 ; v1(87.245,21.713) 86.728,21.713 86.441,21.427 R38.2@86.441,20.603 86.441,20.49 86.203,20.49 86.178,20.464 86.178,17.569 ; 87.38,34.268 v1(87.38,34.138) U4.A3@87.38,33.918 87.677,34.215 87.677,35.527 87.651,35.552 ; 87.38,38.168 v1(87.38,38.038) U4.G3@87.38,37.818 87.677,38.115 87.677,38.378 87.672,38.383 87.672,38.589 87.652,38.608 87.652,38.809 87.38,39.081 U4.J3@87.38,39.118 86.756,39.742 86.606,39.742 U4.K4@86.58,39.768 ; v1(87.38,42.148) U4.P3@87.38,42.368 ; 87.38,43.318 v1(87.38,43.448) U4.T3@87.38,43.668 87.067,43.355 87.067,42.87 86.895,42.698 86.895,42.402 86.978,42.319 87.095,42.319 87.117,42.342 87.354,42.342 U4.P3@87.38,42.368 ; v1@87.38,47.33 v1(87.38,47.348) U4.AB3@87.38,47.568 87.38,47.605 87.066,47.919 87.066,48.233 86.92,48.379 86.591,48.379 U4.AB5@85.78,47.568 ; 87.83,41.718 v1(87.96,41.718) U4.N2@88.18,41.718 87.869,42.029 87.719,42.029 U4.P3@87.38,42.368 ; 88.18,36.218 v1(88.18,36.088) U4.D2@88.18,35.868 ; 88.18,40.118 v1(88.18,39.988) U4.K2@88.18,39.768 88.484,39.464 88.634,39.464 U4.J1@88.98,39.118 ; 88.18,45.268 v1(88.18,45.398) U4.W2@88.18,45.618 88.543,45.255 88.693,45.255 U4.V1@88.98,44.968 ; C72.2@88.441,52.349 v1(89.119,52.349) 90.441,52.349 ; 88.954,39.442 88.954,39.364 v1(88.98,39.338) U4.J1@88.98,39.118 ; 88.98,35.568 v1(88.98,35.438) U4.C1@88.98,35.218 88.667,35.531 ; 88.98,36.868 v1(88.98,36.738) U4.E1@88.98,36.518 ; 88.98,38.168 v1(88.98,38.038) U4.G1@88.98,37.818 ; 88.98,42.018 v1(88.98,42.148) U4.P1@88.98,42.368 89.277,42.665 89.277,43.371 ; 88.98,43.318 v1(88.98,43.448) U4.T1@88.98,43.668 89.277,43.371 ; 88.98,44.618 v1(88.98,44.748) U4.V1@88.98,44.968 ; 88.98,45.918 88.98,46.048 v1(88.98,46.056) U4.Y1@88.98,46.268 89.277,45.971 89.277,45.265 U4.V1@88.98,44.968 ; 89.441,30.603 92.441,33.603 ; v1(89.683,31.268) 89.683,31.077 89.441,30.835 C74.2@89.441,30.058 89.441,30.336 89.455,30.349 C107.2@92.441,30.349 ; v1(91.441,52.474) D11.1@91.441,53.349 90.441,52.349 ; v7(91.893,64.559) 91.893,68.255 92.337,68.699 U19.3@93.891,68.699 v1(94.691,68.699) ; v1(92.934,31.596) 92.934,31.531 92.441,31.038 ; v1(92.934,49.559) 92.934,49.494 92.441,49.001 ; v1(93.747,35.596) 93.747,35.437 93.441,35.131 C26.2@93.441,34.349 C26.2@93.188,34.349 ; v1(94.091,9.599) U22.3@94.091,8.799 94.091,7.485 94.422,7.155 v7(97.278,7.155) ; v7(95.157,46.333) 95.143,46.347 94.56,46.347 94.221,46.686 94.221,46.936 92.807,48.349 C96.2@92.441,48.349 92.441,49.001 ; C75.2@95.441,29.058 95.441,29.981 ; v7(95.792,46.347) 97.241,46.347 97.267,46.372 C81.2@97.267,47.349 v1(97.844,47.349) ; v1(96.186,30.268) 95.728,30.268 95.441,29.981 ; v7(97.049,54.831) 97.724,54.831 98.243,55.349 C42.2@99.441,55.349 99.441,56.309 99.728,56.596 v1(100.25,56.596) ; C76.2@97.441,37.058 97.441,37.771 ; v1(97.441,76.799) J4.27@97.441,76.349 J4.27@97.441,76.09 ; v1(97.811,38.268) 97.811,38.141 97.441,37.771 ; v1(97.941,75.899) J4.28@97.941,76.349 J4.28@97.941,76.09 ; C27.2@98.441,32.349 98.441,33.156 ; v1(98.441,78.005) J4.29@98.441,76.349 ; v1(98.624,33.559) 98.624,33.339 98.441,33.156 ; v1(98.941,74.693) J4.30@98.941,76.349 J4.29@98.441,76.349 ; v7(99.132,41.292) 99.132,42.115 D16.1@100.441,43.424 v1(100.441,44.299) ; v1(99.536,62.099) U12.15@100.006,62.099 100.508,62.099 100.758,62.349 U12.17@101.441,62.349 ; v1(99.941,79.299) J4.32@99.941,78.849 99.941,78.021 99.916,77.995 98.784,77.995 98.441,77.652 J4.29@98.441,76.349 ; v1(100.823,68.349) C36.2@100.441,68.349 100.441,69.944 99.894,70.491 v7(99.894,71.518) 97.441,73.971 J4.27@97.441,76.09 ; U12.11@101.191,63.784 v1(101.191,63.314) 101.191,63.01 100.986,62.804 U12.17@101.441,62.349 ; C24.2@101.267,50.349 v1(101.944,50.349) 102.409,50.349 102.434,50.375 v7(102.434,53.281) ; v1(101.441,62.949) U12.17@101.441,62.349 ; U12.3@101.691,60.914 v1(101.691,61.384) 101.691,61.739 101.697,61.745 101.697,62.349 U12.17@101.441,62.349 ; v1(101.766,34.799) C141.2@101.441,34.799 100,34.799 98.441,33.241 98.441,33.156 ; v1(103.501,47.559) 103.501,47.277 103.441,47.218 C28.2@103.441,46.349 103.806,46.349 104.494,45.661 105.987,45.661 ; 105.032,25.849 105.168,25.713 105.168,25.173 105.291,25.049 U15.4@105.441,25.049 v1(105.866,25.049) ; v7(105.126,78.808) 109.041,78.808 J8.3@109.041,77.349 v1(109.041,78.899) ; C29.2@105.441,51.349 105.441,51.998 ; 105.441,51.971 v7(108.378,54.907) 108.928,54.907 110.079,56.058 C40.2@110.441,56.058 110.441,56.769 110.816,57.143 v1(110.816,57.268) ; v1(105.939,52.559) 105.939,52.496 105.441,51.998 ; v1(105.939,56.591) 105.939,56.399 105.7,56.16 ; v1(106.891,37.561) B2.10@107.184,37.561 ; v1(106.891,39.359) 107.182,39.359 B2.8@107.184,39.361 ; v1(106.891,41.161) B2.6@107.184,41.161 ; v1(106.891,42.961) B2.4@107.184,42.961 ; v1(107.36,32.91) 107.329,32.91 106.767,32.349 C142.2@106.15,32.349 106.15,32.91 107.26,34.02 B2.11@107.26,36.661 ; B2.6@107.503,41.161 B2.6@107.184,41.161 ; B2.4@107.503,42.961 B2.4@107.184,42.961 ; v1(107.565,60.577) 107.565,60.327 107.441,60.204 C44.2@107.441,59.464 106.244,59.464 105.7,58.92 105.7,56.16 ; v1(108.016,45.661) B2.1@107.503,45.661 105.987,45.661 ; v1(108.116,40.261) B2.7@107.503,40.261 B2.7@107.184,40.261 ; v1(108.116,42.061) B2.5@107.503,42.061 B2.5@107.184,42.061 ; v1(108.116,43.861) B2.3@107.503,43.861 B2.3@107.184,43.861 ; v7(109.8,38.448) 109.8,36.979 109.482,36.661 v1(108.116,36.661) B2.11@107.503,36.661 B2.11@107.26,36.661 ; v1(113.441,9.049) U10.3@113.441,8.249 113.441,7.498 113.454,7.485 v7(117.471,7.485) ; v7(113.458,29.964) 113.458,31.012 114.441,31.996 C144.2@114.441,32.349 115.059,32.349 115.62,32.91 v1(115.651,32.91) ; v1(114.067,60.577) 113.57,60.577 113.283,60.29 C45.2@113.283,59.464 113.283,59.349 C55.2@117.441,59.349 v1(117.441,58.672) 117.441,57.396 117.735,57.103 C46.2@117.735,56.586 ; v1(114.231,51.601) 114.419,51.601 114.671,51.349 C132.2@115.441,51.349 115.441,50.995 116.48,49.956 v7(116.48,49.166) 118.372,49.166 118.741,48.797 B2.39@118.741,47.349 v1(118.741,46.737) ; C71.2@115.441,27.698 v1(115.441,27.021) 115.441,24.246 v7(115.871,23.817) ; v1(115.841,78.899) J8.4@115.841,77.349 115.841,74.795 115.854,74.782 v7(119.401,74.782) ; v7(117.064,71.391) 119.459,68.997 C34.2@120.708,68.997 120.708,69.957 120.995,70.244 v1(121.382,70.244) ; v1(118.131,57.699) 118.131,57.586 117.735,57.189 C46.2@117.735,56.586 ; B2.23@118.741,34.973 v1(118.741,34.361) 118.741,34.053 ; v1(119.441,28.299) D18.1@119.441,27.424 120.392,27.424 120.417,27.45 120.417,28.186 v7(121.205,28.973) ; v1(119.891,32.024) C143.2@119.891,32.349 119.891,32.776 118.741,33.926 118.741,34.053 ; C138.2@120.441,49.976 120.441,50.771 ; v1(120.57,51.147) 120.57,50.899 120.441,50.771 ; v1(121.267,37.561) B2.27@121.879,37.561 ; v1(122.195,57.374) 121.728,57.374 121.441,57.087 C35.2@121.441,56.127 119.782,56.127 119.323,56.586 ; v1(122.492,40.261) B2.30@121.879,40.261 121.23,40.261 120.868,40.624 120.868,41.724 121.205,42.061 B2.32@121.879,42.061 v1(122.492,42.061) ; v7(122.5,34.028) 118.767,34.028 118.741,34.053 ; v7(122.5,51.3) 120.899,51.3 120.441,50.843 120.441,50.771 ; v7(122.5,64) 122.993,64 123.364,63.629 124.176,63.629 ; v1(123.821,74.916) 123.328,74.916 123.041,75.203 J1.2@123.041,76.399 123.041,77.017 122.521,77.538 J1.3@121.741,77.538 ; v1(124.634,60.742) 124.634,60.526 124.441,60.334 ; v1(124.634,64.742) 124.634,64.526 124.441,64.334 C32.2@124.441,63.629 124.176,63.629 ; v7(125.116,36.035) 127.831,36.035 D13.2@128.441,35.424 v1(128.441,36.299) ; J1.4@125.141,77.799 v1(125.141,78.699) 125.141,80.066 124.722,80.485 122.182,80.485 121.741,80.044 v1(121.741,78.699) J1.3@121.741,77.799 J1.3@121.741,77.538 ; v7(127.377,74.262) 124.764,74.262 121.741,77.284 J1.3@121.741,77.538 ; C39.2@128.15,57.349 129.073,57.349 ; v1(129.091,16.599) U11.3@129.091,15.799 129.091,14.889 129.485,14.495 v7(132.152,14.495) ; v1(129.36,58.107) 129.36,57.636 129.073,57.349 ; U20.3@129.891,67.699 v1(130.691,67.699) 133.295,67.699 133.721,68.126 ; C38.2@132.272,62.318 133.195,62.318 ; v7(132.381,58.818) 130.827,58.818 129.358,57.349 129.073,57.349 ; v1(133.482,62.984) 133.482,62.605 133.195,62.318 ; v7(134.247,51.3) 134.305,51.3 135.791,49.813 U13.3@135.791,48.899 v1(135.791,48.099) ; v1(134.834,68.674) 134.685,68.674 134.36,68.349 ; v7(135.2,25.582) 135.2,24.82 135.273,24.747 139.061,24.747 139.091,24.778 U18.3@139.091,25.799 v1(139.091,26.599) ; v1(136.091,67.149) J5.4@136.566,67.149 ; v7(136.14,60.596) 139.962,60.596 140.341,60.975 J5.MP1@140.341,62.399 v1(139.891,62.399) ; v1(137.041,65.949) J5.3@136.566,65.949 J5.3@136.445,65.949 ; v7(137.435,44.848) 139.091,43.192 v1(139.091,41.599) U14.3@139.091,40.799 ; J5.MP2@140.341,68.299 v1(139.891,68.299) 138.509,68.299 137.359,67.149 J5.4@136.566,67.149 ; v1(4.441,52.599) v1(4.441,56.099) SW2.A'@4.441,57.749 4.441,57.967 4.937,58.463 SW2.B'@8.441,58.463 ; SW1.1@6.441,28.649 8.441,26.649 v1(8.441,23.599) SW1.A'@8.441,21.949 SW1.A'@8.441,20.845 ; SW2.B'@8.441,58.463 8.441,62.251 8.691,62.501 SW3.3@8.691,63.349 ; *.8@14.931,42.849 14.931,42.349 *.9@15.141,42.349 v1(15.541,42.349) *.15@15.805,42.349 ; 23.641,78.375 24.075,78.808 J6.S2@25.741,78.808 ; 23.641,78.375 23.641,78.605 ; 23.641,78.605 24.048,79.011 25.741,79.011 J6.S2@25.741,78.808 ; v1@33.941,76.802 33.941,76.852 ; 36.775,31.254 38.121,31.254 39.026,30.349 C146.2@39.441,30.349 ; C146.2@39.441,30.349 39.925,30.349 41.441,28.832 ; 41.441,28.104 41.441,28.832 ; R71.1@46.441,22.099 46.441,22.914 ; R71.1@46.441,22.099 46.441,22.856 ; 46.441,22.856 46.441,22.914 ; J2.26@46.441,76.09 46.941,76.09 J2.27@46.941,76.349 v1(46.941,76.799) 46.941,76.852 47.195,77.106 ; 47.195,77.106 51.431,77.106 v7(52.447,76.09) 56.441,76.09 J3.1@56.441,76.349 v1(56.441,76.799) 56.441,76.852 ; 52.066,26.941 52.066,25.965 C148.2@52.142,25.965 ; 52.066,26.941 52.142,26.865 C148.2@52.142,25.965 ; 56.441,37.272 56.441,38.282 56.759,38.6 v7(59,38.6) 59.039,38.6 ; 56.441,76.852 56.467,76.878 57.916,76.878 57.941,76.852 J3.4@57.941,76.349 v1(57.941,75.899) 58.122,75.719 58.687,75.719 58.779,75.811 59.416,75.811 59.441,75.836 ; 56.82,40.349 56.823,40.349 58.141,40.349 U1.AB33@58.941,39.549 ; U1.AB33@58.941,39.549 58.67,39.278 58.67,38.97 59.039,38.6 ; 59.441,75.836 59.467,75.811 60.916,75.811 60.941,75.836 v1(60.941,75.899) J3.10@60.941,76.349 60.941,78.922 61.386,79.367 61.997,79.367 62.441,78.922 62.441,76.852 ; U1.AM31@59.741,35.149 59.94,35.149 U1.AM29@60.541,35.149 ; U1.Y29@60.541,40.349 U1.W28@60.941,40.749 v1(61.116,40.749) 61.441,40.749 U1.W26@61.541,40.849 ; U1.AF26@61.541,37.749 U1.AF25@61.941,37.749 ; U1.AC26@61.541,39.049 U1.AC25@61.941,39.049 ; U1.AC26@61.541,39.049 61.541,39.149 v1(61.541,39.224) U1.AB26@61.541,39.549 61.54,39.551 61.54,39.948 U1.AA26@61.541,39.949 61.362,40.128 61.362,40.17 U1.Y26@61.541,40.349 v1(61.541,40.524) U1.W26@61.541,40.849 ; U1.W26@61.541,40.849 U1.W25@61.941,40.849 v1(62.116,40.849) U1.W24@62.441,40.849 ; U1.T26@61.541,42.149 U1.T25@61.941,42.149 v1(61.941,41.974) U1.U25@61.941,41.649 v1(62.116,41.649) U1.U24@62.441,41.649 ; U1.F26@61.718,46.349 U1.F26@61.841,46.349 ; U1.F26@61.841,46.349 61.841,46.174 61.841,46.049 U1.G25@61.925,45.966 ; U1.AF25@61.941,37.749 U1.AF24@62.441,37.749 ; U1.AC25@61.941,39.049 U1.AD25@61.941,38.649 62.116,38.649 v1(62.294,38.649) U1.AD24@62.441,38.649 U1.AC24@62.441,39.049 ; U1.AJ24@62.441,36.449 v1@62.441,36.587 ; U1.AF24@62.441,37.749 U1.AF23@62.841,37.749 ; U1.W24@62.441,40.849 U1.V24@62.441,41.249 U1.U24@62.441,41.649 ; U1.W24@62.441,40.849 v1(62.441,40.524) U1.Y24@62.441,40.349 U1.Y23@62.841,40.349 ; U1.U24@62.441,41.649 U1.U23@62.841,41.649 U1.U22@63.241,41.649 v1(63.416,41.649) U1.U21@63.741,41.649 ; U1.U24@62.441,41.649 62.441,41.974 62.441,42.079 U1.T24@62.441,42.149 ; U1.N24@62.441,43.449 U1.N23@62.841,43.449 v1(62.841,43.274) U1.P23@62.841,42.949 U1.P22@63.241,42.949 63.4,42.949 63.42,42.969 U1.P21@63.722,42.969 ; U1.N24@62.441,43.449 U1.M24@62.441,43.849 62.429,43.849 62.429,44.099 62.441,44.112 U1.L24@62.441,44.249 U1.L23@62.841,44.249 U1.L23@62.841,44.37 ; U1.AF23@62.841,37.749 U1.AF22@63.241,37.749 ; U1.Y23@62.841,40.349 U1.Y22@63.241,40.349 ; 63.14,48.608 65.53,48.608 ; U1.AL22@63.241,35.649 63.241,35.662 63.368,35.788 63.368,35.91 63.241,36.037 U1.AK22@63.241,36.049 ; U1.AL22@63.241,35.649 63.441,35.449 v1@63.441,34.955 ; U1.AK22@63.241,36.049 U1.AJ22@63.241,36.449 ; U1.U21@63.741,41.649 63.766,41.673 64.117,41.673 U1.U20@64.141,41.649 64.141,41.637 64.176,41.602 64.176,41.597 64.25,41.523 64.402,41.523 64.529,41.649 U1.U19@64.541,41.649 ; U1.AK20@64.141,36.049 U1.AJ20@64.141,36.449 ; U1.AJ20@64.141,36.449 U1.AJ19@64.541,36.449 ; U1.AC20@64.141,39.049 U1.AC19@64.541,39.049 ; U1.AJ19@64.541,36.449 v1(64.574,36.448) ; U1.U19@64.541,41.649 U1.U19@64.541,41.726 ; U1.G19@64.541,45.949 U1.H19@64.541,45.549 v1(64.716,45.549) 64.716,45.524 64.833,45.408 64.95,45.408 65.032,45.49 65.032,45.528 65.041,45.537 U1.H18@65.041,45.549 U1.H17@65.441,45.549 ; 65.041,39.183 65.041,39.224 U1.AB18@65.041,39.549 65.041,39.56 65.146,39.665 65.146,39.832 65.041,39.937 U1.AA18@65.041,39.949 64.893,40.098 64.893,40.201 U1.Y18@65.041,40.349 ; U1.Y18@65.041,40.349 U1.Y17@65.441,40.349 ; U1.U17@65.441,41.649 65.466,41.673 65.817,41.673 U1.U16@65.841,41.649 65.967,41.775 66.216,41.775 U1.U15@66.341,41.649 ; U1.R17@65.441,42.549 U1.P17@65.441,42.949 ; U1.P17@65.441,42.949 65.441,43.274 ; 65.441,43.274 U1.N17@65.441,43.449 ; U1.N17@65.441,43.449 U1.N16@65.841,43.449 ; U1.J17@65.441,45.149 U1.H17@65.441,45.549 ; U1.AK16@65.841,36.049 v1(66.166,36.049) U1.AK15@66.341,36.049 U1.AK14@66.741,36.049 U1.AL14@66.741,35.649 ; U1.AK16@65.841,36.049 U1.AJ16@65.841,36.449 v1@65.841,36.575 ; v1@65.841,36.575 65.841,36.624 U1.AH16@65.841,36.949 ; U1.AH16@65.841,36.949 66.166,36.949 U1.AH15@66.341,36.949 U1.AG15@66.341,37.349 66.214,37.477 66.214,37.621 U1.AF15@66.341,37.749 ; U1.AF15@66.341,37.749 U1.AF14@66.741,37.749 ; U1.U15@66.341,41.649 U1.U14@66.741,41.649 ; U1.AL14@66.741,35.649 U1.AL13@67.141,35.649 67.289,35.501 67.493,35.501 U1.AL12@67.641,35.649 ; U1.AF14@66.741,37.749 v1(66.741,37.924) U1.AE14@66.741,38.249 U1.AD14@66.741,38.649 ; U1.AF14@66.741,37.749 U1.AG14@66.741,37.349 U1.AH14@66.741,36.949 U1.AH13@67.141,36.949 v1(67.466,36.949) U1.AH12@67.641,36.949 v1(67.641,36.624) U1.AJ12@67.641,36.449 U1.AK12@67.641,36.049 ; U1.AD14@66.741,38.649 U1.AC14@66.741,39.049 U1.AC14@66.741,39.1 ; U1.U14@66.741,41.649 U1.U13@67.141,41.649 U1.V13@67.141,41.249 v1(67.466,41.249) U1.V12@67.641,41.249 U1.U12@67.641,41.649 U1.U11@68.041,41.649 v1(68.041,41.974) U1.T11@68.041,42.149 U1.T10@68.441,42.149 ; U1.N14@66.741,43.449 U1.M14@66.741,43.849 U1.L14@66.741,44.249 ; U1.G14@66.741,45.949 66.883,45.949 66.899,45.966 U1.G13@67.125,45.966 ; J3.22@66.941,76.09 J3.23@67.441,76.09 ; J3.22@66.941,76.09 J3.22@66.941,76.349 66.941,76.802 69.062,78.922 71.371,78.922 73.441,76.852 v1(73.441,76.799) J3.35@73.441,76.349 73.49,76.301 73.49,76.051 74.482,75.059 75.151,75.059 75.941,75.849 v1(75.941,75.899) J3.40@75.941,76.349 75.941,76.802 76.941,77.802 ; v1@67.041,47.411 67.041,47.374 v1(67.041,46.924) U1.E13@67.041,46.749 67.05,46.74 67.05,46.36 67.183,46.228 67.183,46.024 U1.G13@67.125,45.966 ; J3.23@67.441,76.09 J3.24@67.941,76.09 ; 67.641,35.396 67.339,35.396 67.195,35.251 67.195,33.808 67.441,33.562 U1.AT12@67.441,33.549 67.697,33.293 67.697,29.71 ; 67.641,35.396 U1.AL12@67.641,35.649 ; U1.W12@67.641,40.849 U1.W11@68.041,40.849 68.402,40.849 U1.W10@68.441,40.81 ; 67.697,29.71 68.058,29.349 70.425,29.349 ; U1.Y10@68.441,40.421 68.441,40.524 U1.W10@68.441,40.81 ; U1.W10@68.441,40.81 U1.W10@68.441,40.849 U1.V10@68.441,41.249 v1(68.766,41.249) U1.V9@68.941,41.249 ; U1.T10@68.441,42.149 v1(68.441,41.974) 68.609,41.974 68.766,41.817 v1(68.766,41.649) U1.U9@68.941,41.649 U1.V9@68.941,41.249 ; U1.T10@68.441,42.149 U1.R10@68.441,42.549 v1(68.766,42.549) U1.R9@68.941,42.549 ; U1.N10@68.441,43.449 U1.M10@68.441,43.849 v1(68.766,43.849) U1.M9@68.941,43.849 ; U1.K10@68.441,44.749 U1.J10@68.441,45.149 U1.J9@68.941,45.149 U1.H9@68.941,45.549 U1.J8@69.341,45.149 ; 68.525,56.697 68.842,57.015 C56.2@71.441,57.015 ; U1.AF9@68.941,37.749 U1.AF8@69.341,37.749 ; U1.B6@69.941,47.949 70.341,47.549 ; C56.2@71.441,57.015 74.049,57.015 74.367,56.697 ; v1@71.541,45.509 71.567,45.483 71.607,45.483 U1.H1@71.941,45.149 ; U1.C2@71.541,47.465 71.7,47.465 ; 71.7,47.465 72.208,46.957 72.208,46.626 72.183,46.601 71.967,46.601 71.941,46.576 U1.E1@71.941,46.449 ; U1.P1@71.941,42.749 72.208,43.016 72.208,43.355 ; U1.P1@71.941,42.749 72.228,42.749 72.437,42.541 72.437,41.796 72.26,41.619 72.26,41.596 72.083,41.42 ; U1.L1@71.941,43.949 72.208,43.683 72.208,43.355 ; U1.L1@71.941,43.949 U1.K2@71.541,44.349 71.541,44.362 71.932,44.753 71.932,45.14 U1.H1@71.941,45.149 ; U1.H1@71.941,45.149 72.208,45.416 72.208,46.183 U1.E1@71.941,46.449 ; U4.P12@80.18,42.368 80.206,42.394 80.206,42.568 80.472,42.833 80.472,43.339 80.18,43.631 U4.T12@80.18,43.668 ; U4.P12@80.18,42.368 80.514,42.034 80.514,41.743 80.539,41.718 U4.N11@80.98,41.718 ; U4.T12@80.18,43.668 79.879,43.969 79.879,44.667 U4.V12@80.18,44.968 ; 80.488,38.346 80.615,38.473 80.615,38.778 80.641,38.803 81.454,38.803 81.479,38.778 ; U4.K11@80.98,39.768 81.301,39.768 81.479,39.59 ; U4.K11@80.98,39.768 81.479,39.269 81.479,38.778 ; U4.N11@80.98,41.718 81.352,41.718 81.377,41.743 81.377,41.965 U4.P10@81.78,42.368 ; 81.479,39.59 v1@81.78,39.289 ; U4.V8@83.38,44.968 83.689,45.277 83.689,45.959 U4.Y8@83.38,46.268 ; U4.V8@83.38,44.968 83.079,44.667 83.079,43.969 U4.T8@83.38,43.668 84.008,43.668 ; U4.Y8@83.38,46.268 83.079,46.569 83.079,47.267 U4.AB8@83.38,47.568 ; 84.008,43.668 U4.T5@85.78,43.668 ; U4.C5@85.78,35.229 U4.C5@85.78,35.218 86.114,35.552 86.264,35.552 ; U4.C5@85.78,35.229 85.593,35.416 85.593,35.642 85.488,35.747 85.488,36.189 85.78,36.481 U4.E5@85.78,36.518 U4.E5@85.801,36.539 ; U4.T5@85.78,43.668 85.467,43.981 85.467,44.655 U4.V5@85.78,44.968 ; U4.V5@85.78,44.968 85.467,45.281 85.467,45.955 U4.Y5@85.78,46.268 ; U4.Y5@85.78,46.268 85.467,46.581 85.467,47.255 U4.AB5@85.78,47.568